# Altium PCB 光耦驱动.PcbDoc
Units mil, origin at the board's own origin, x right, y up, seen from the top; angles counter-clockwise.
Board outline 5000 x 4000 mil, 2 copper layers (Top Layer, Bottom Layer); 45 components, 35 nets, 203 pads, 0 vias.
Unrouted connection lines stored in the file: 9.
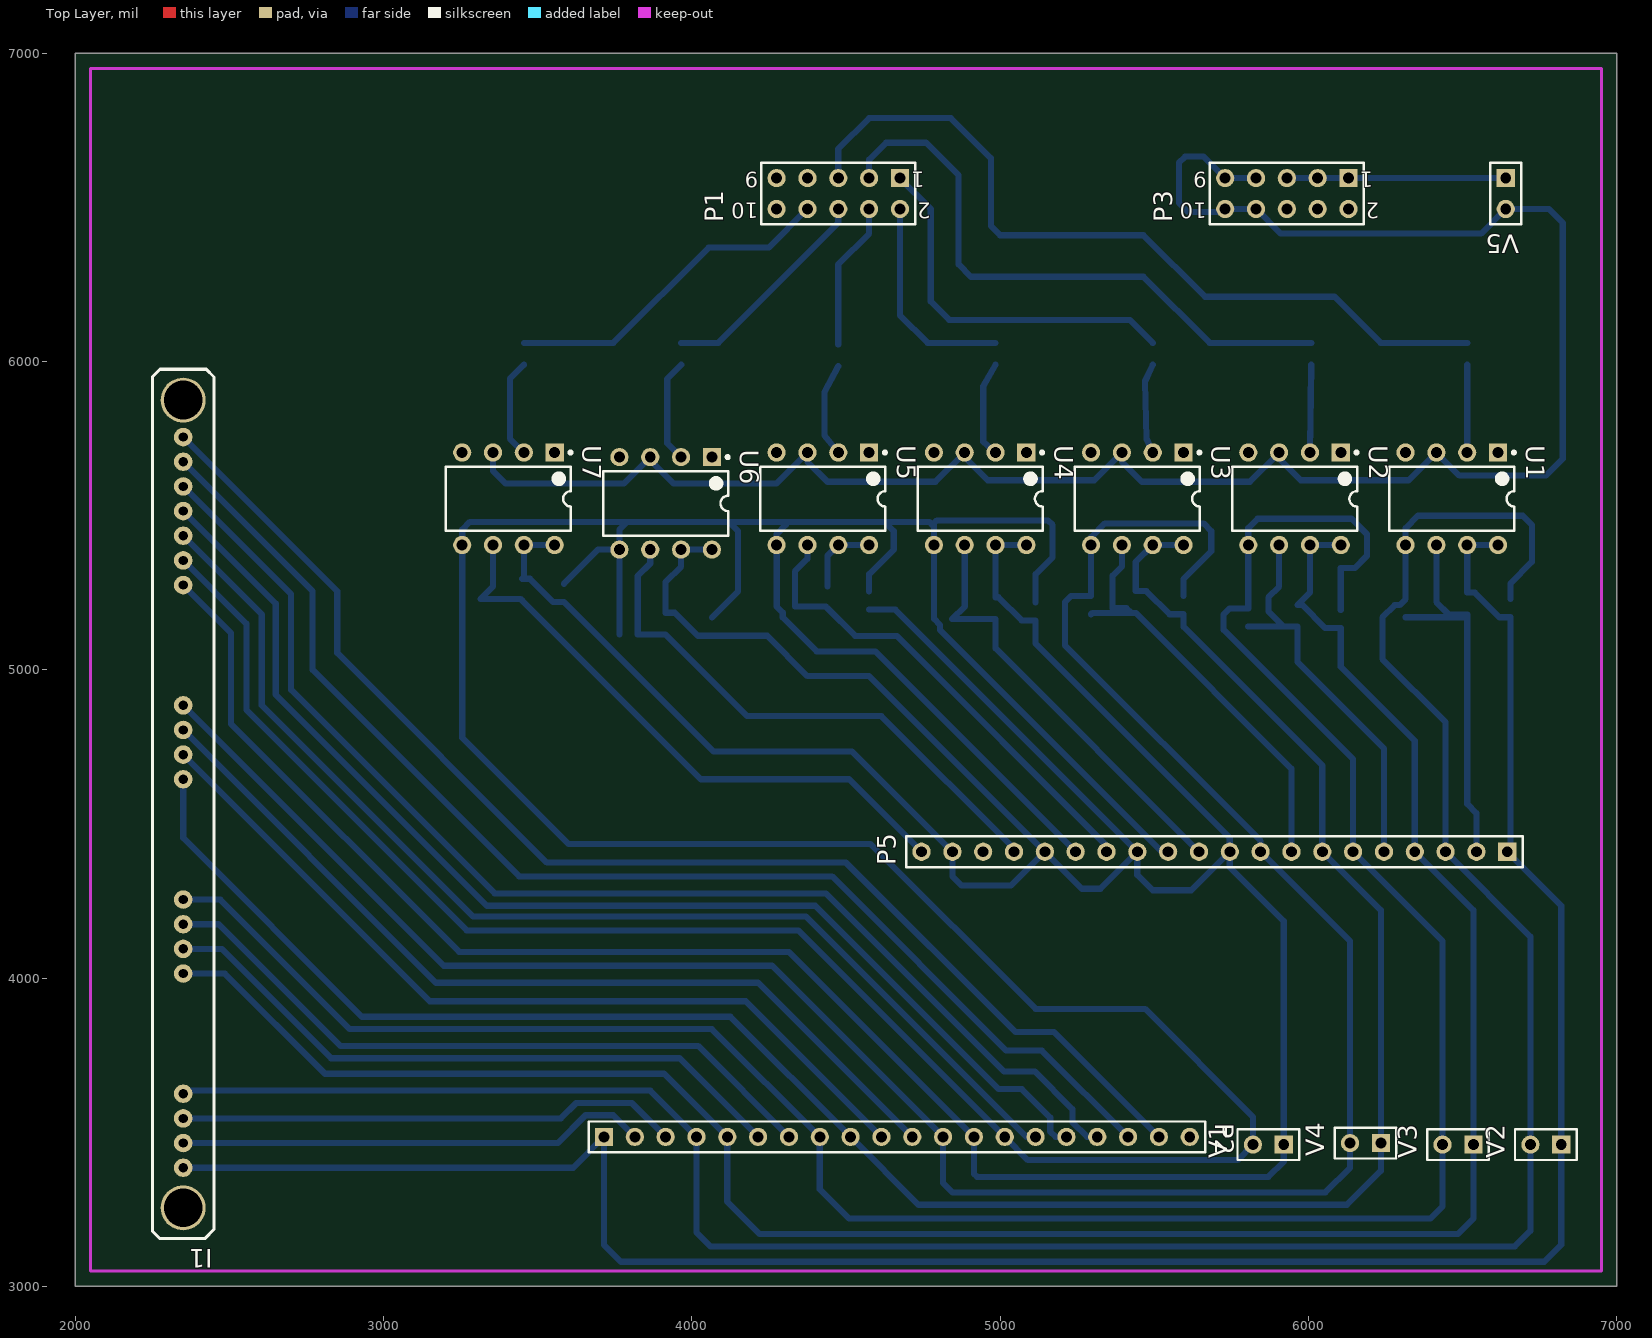
[diagram p0: Top Layer view]
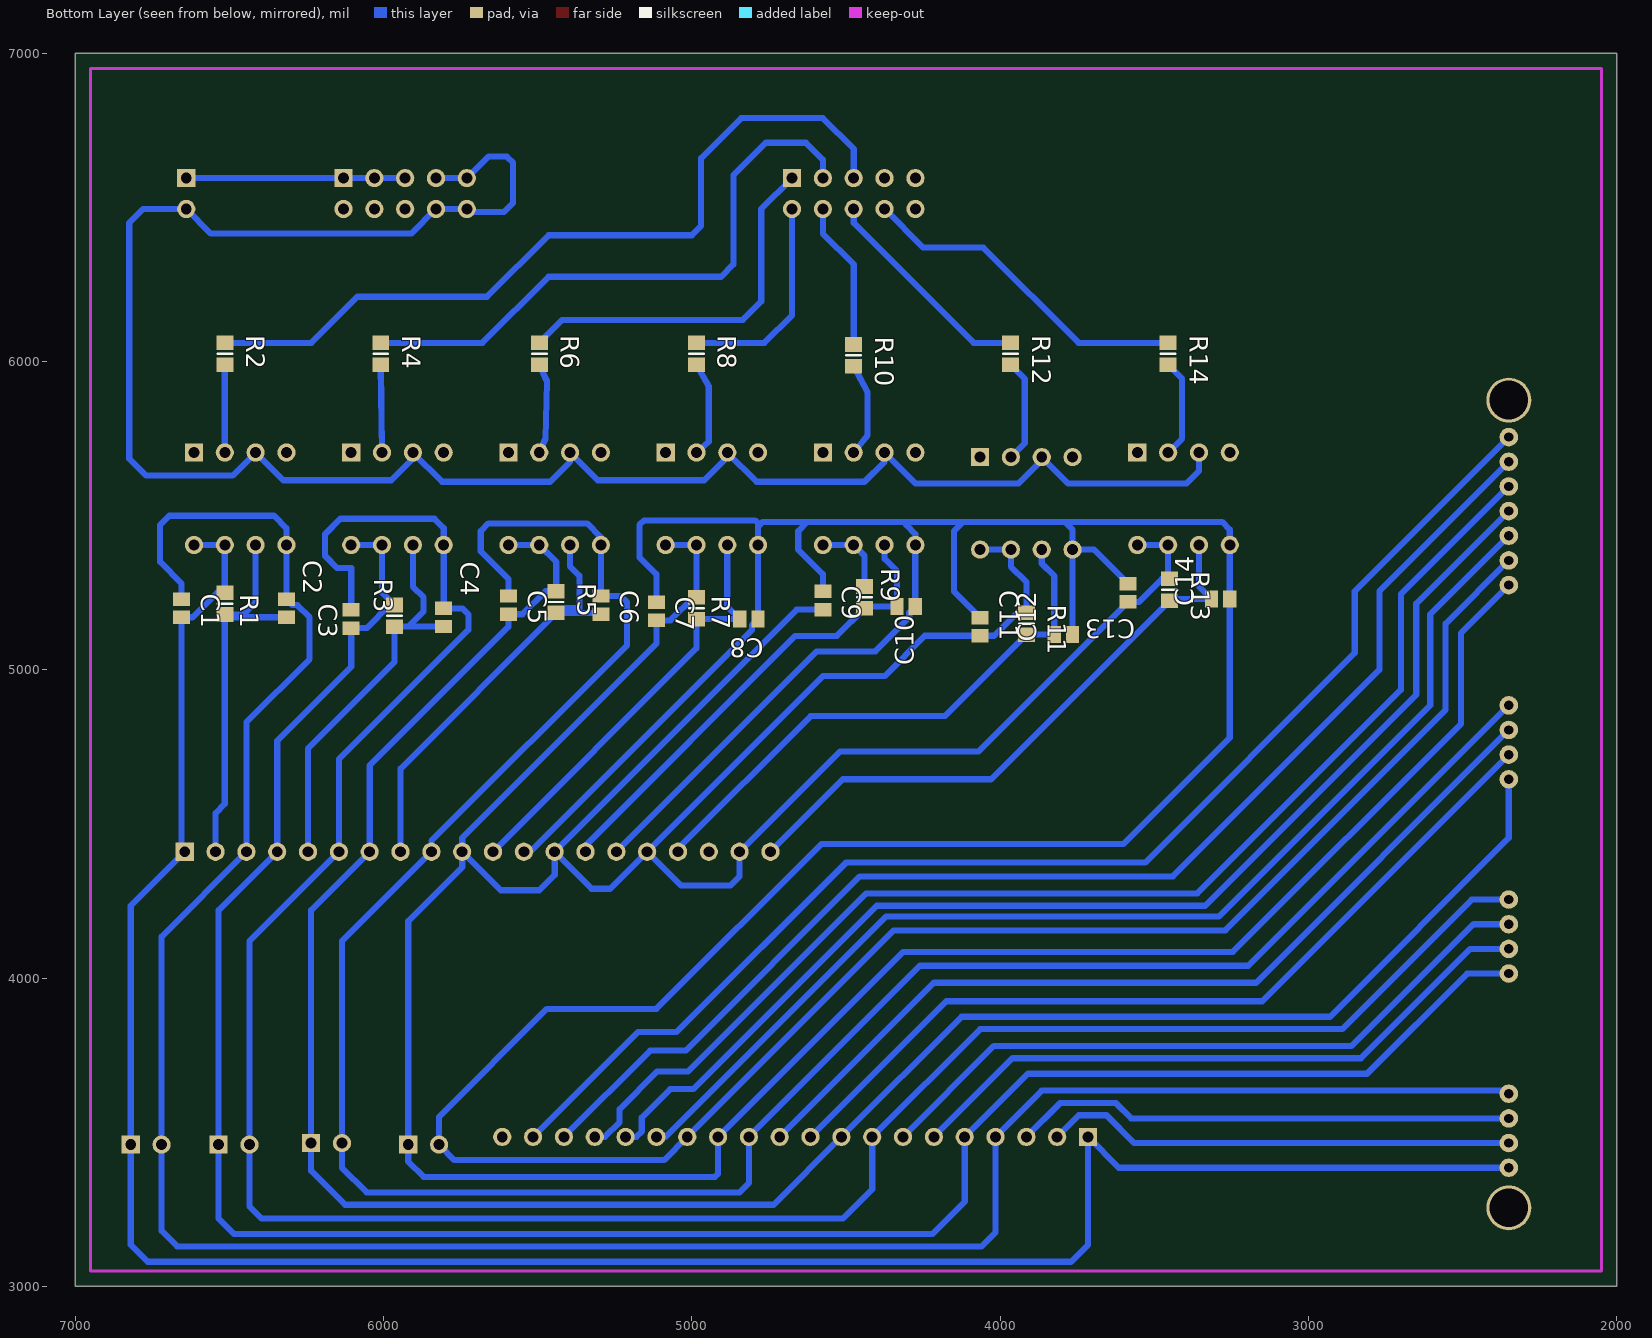
[diagram p1: Bottom Layer view, seen from below]

## Layer stack, top to bottom
Top Layer: signal copper 1.4
Dielectric: dielectric 12.6, FR-4, Dk 4.8
Bottom Layer: signal copper 1.4

## Board outline
2000,3000 7000,3000 7000,7000 2000,7000

## Design rules (kind name [scope] priority, off if disabled: settings)
Clearance [All] p1: gap=8
PolygonConnect [All] p1: connectstyle=Relief reliefconductorwidth=10 reliefentries=4 polygonreliefangle="90 Angle" airgapwidth=10
RoutingVias [All] p1: holewidth=25 width=40 viastyle="Through Hole" minholewidth=28 minwidth=50 maxholewidth=28 maxwidth=50
SolderMaskExpansion [All] p1: expansion=4
Width [All] p1: maxlimit=30 minlimit=20 preferedwidth=20
28 further rules are at their usual default settings.

## Components (designator, comment, footprint, x,y, rotation, side; value= is the part's Value field where it differs from the comment)
C1 "Cap" C0805 6655,5200 r270 bottom
C2 "Cap" C0805 6315,5200 r270 bottom
C3 "Cap" C0805 6105,5165 r270 bottom
C4 "Cap" C0805 5805,5170 r270 bottom
C5 "Cap" C0805 5595,5210 r270 bottom
C6 "Cap" C0805 5295,5210 r270 bottom
C7 "Cap" C0805 5115,5190 r270 bottom
C8 "Cap" C0805 4815,5165 r0 bottom
C9 "Cap" C0805 4575,5225 r270 bottom
C10 "Cap" C0805 4305,5205 r0 bottom
C11 "Cap" C0805 4065,5140 r270 bottom
C12 "Cap" C0805 3795,5115 r0 bottom
C13 "Cap" C0805 3585,5250 r270 bottom
C14 "Cap" C0805 3285,5230 r0 bottom
I1 "ipm" ipm 2350,3385 r180 top
P1 "Header 5X2" HDR2X5 4675,6595 r180 top
P2 "Header 20" HDR1X20 3715,3485 r0 top
P3 "Header 5X2" HDR2X5 6130,6595 r180 top
P5 "Header 20" HDR1X20 6645,4410 r180 top
R1 "Res2" 6-0805_N 6515,5215 r270 bottom
R2 "Res2" 6-0805_N 6515,6025 r270 bottom
R3 "Res2" 6-0805_N 5965,5175 r270 bottom
R4 "Res2" 6-0805_N 6009.17,6025 r270 bottom
R5 "Res2" 6-0805_N 5440,5220 r270 bottom
R6 "Res2" 6-0805_N 5495,6025 r270 bottom
R7 "Res2" 6-0805_N 4985,5200 r270 bottom
R8 "Res2" 6-0805_N 4985,6025 r270 bottom
R9 "Res2" 6-0805_N 4440,5235 r270 bottom
R10 "Res2" 6-0805_N 4475,6020 r270 bottom
R11 "Res2" 6-0805_N 3915,5150 r270 bottom
R12 "Res2" 6-0805_N 3965.83,6025 r270 bottom
R13 "Res2" 6-0805_N 3450,5260 r270 bottom
R14 "Res2" 6-0805_N 3455,6025 r270 bottom
U1 "4504" DIP-8 6465,5555 r270 top
U2 "4504" DIP-8 5955,5555 r270 top
U3 "4504" DIP-8 5445,5555 r270 top
U4 "4504" DIP-8 4935,5555 r270 top
U5 "4504" DIP-8 4425,5555 r270 top
U6 "4504" DIP-8 3915,5540 r270 top
U7 "4504" DIP-8 3405,5555 r270 top
V1 "Header 2" HDR1X2 5920,3460 r180 top
V2 "Header 2" HDR1X2 6820,3460 r180 top
V3 "Header 2" HDR1X2 6535,3460 r180 top
V4 "Header 2" HDR1X2 6235,3465 r180 top
V5 "Header 2" HDR1X2 6640,6595 r270 top

## Footprints (in the part's own frame and the unit in brackets; to place one, negate y for a bottom-side part, rotate by r counter-clockwise, add the part's x,y. Pads: shape width x height; smd on the part's side, far side on the other; paste and mask are expansions set on the pad)
6-0805_N [mm] "Chip Resistor, Body 2.0x1.2mm, IPC Medium Density"
  rect 1.2x1.4 smd: 1(-0.9,0) 2(0.9,0)
  silkscreen extent 0,-0.6 0,0.6, body extent -1.07,-0.7 1.07,0.7, height 0.7
C0805 [mm] "Chip Capacitor, Body 2.0x1.3mm, IPC High Density"
  rect 1.1x1.4 smd: 1(-0.75,0) 2(0.75,0)
  body extent -1.1,-0.72 1.1,0.72, height 1.4
DIP-8 [mm] "DIP; 8 Leads; Row Spacing 7.62 mm; Pitch 2.54 mm"
  rect 1.5x1.5 hole 0.9: 1(-3.81,3.81)
  round 1.5 hole 0.9: 2(-3.81,1.27) 3(-3.81,-1.27) 4(-3.81,-3.81) 5(3.81,-3.81) 6(3.81,-1.27) 7(3.81,1.27) 8(3.81,3.81)
  silkscreen extent -3.93,-5.15 2.65,5.24, body extent -3.6,-5.15 3.6,5.15, height 5.08
HDR1X2 [mm] "Connector; Header; 2 Position"
  rect 1.5x1.5 hole 0.9: 1(0,0)
  round 1.5 hole 0.9: 2(2.54,0)
  silkscreen extent -1.27,-1.27 3.81,1.27
HDR1X20 [mm] "Connector; Header; 20 Position"
  rect 1.5x1.5 hole 0.9: 1(0,0)
  round 1.5 hole 0.9: 2(2.54,0) 3(5.08,0) 4(7.62,0) 5(10.16,0) 6(12.7,0) 7(15.24,0) 8(17.78,0) 9(20.32,0) 10(22.86,0) 11(25.4,0) 12(27.94,0) 13(30.48,0) 14(33.02,0) 15(35.56,0) 16(38.1,0) 17(40.64,0) 18(43.18,0) 19(45.72,0) 20(48.26,0)
  silkscreen extent -1.27,-1.27 49.53,1.27
HDR2X5 [mm] "Connector; Header; 5x2 Position"
  rect 1.5x1.5 hole 0.9: 1(0,0)
  round 1.5 hole 0.9: 2(0,2.54) 3(2.54,0) 4(2.54,2.54) 5(5.08,0) 6(5.08,2.54) 7(7.62,0) 8(7.62,2.54) 9(10.16,0) 10(10.16,2.54)
  silkscreen extent -1.27,-1.27 11.43,3.81
ipm [mil]
  round 60 hole 30: 1(0,0) 2(0,-80) 3(0,-160) 4(0,-240) 5(0,-630) 6(0,-710) 7(0,-790) 8(0,-870) 9(0,-1260) 10(0,-1340) 11(0,-1420) 12(0,-1500) 13(0,-1890) 14(0,-1970) 15(0,-2050) 16(0,-2130) 17(0,-2210) 18(0,-2290) 19(0,-2370)
  round 145.67 hole 125.98: 20(0,130) 21(0,-2490)
  silkscreen extent -100,-2590 100,230

## Part data
C1 C2 C3 C4 C5 C6 C7 C8 C9 C10 C11 C12 C13 C14: "Capacitor"
P1 P3: "Header, 5-Pin, Dual row"
P2 P5: "Header, 20-Pin"
R1 R2 R3 R4 R5 R6 R7 R8 R9 R10 R11 R12 R13 R14: "Resistor"
V1 V2 V3 V4 V5: "Header, 2-Pin"

## Nets (pads, with @x,y where several pads share a name; then routed paths per layer and width w, separated by ;. In a path a pad name is that pad's centre, name@x,y a point inside that pad or via, vN(x,y) a via of type N, cw(c..) or ccw(c..) an arc to the next point about the centre after c; other vN are vias at no path point)
5V: P3.1 P3.3 P3.5 V5.1 | length 710
  Bottom Layer w20: P3.5 P3.3 P3.1 V5.1
BREAK: P1.8 R14.1 | length 1100
  Bottom Layer w20: R14.1 3745.43,6060.43 4055,6370 4250,6370 P1.8
GND: P3.7 P3.8 P3.9 P3.10 U1.3 U2.3 U3.3 U4.3 U5.3 U6.3 U7.3 V5.2 | length 6609
  Bottom Layer w20: U7.3 3355,5645 3395,5605 3780,5605 U6.3 3865,5680 3940,5605 4275,5605 U5.3 4375,5675 4440,5610 4790,5610 U4.3 4885,5690 4960,5615 5305,5615 U3.3 5395,5675 5460,5610 5810,5610 U2.3 5905,5685 5975,5615 6325,5615 U1.3 6490,5630 6770,5630 6825,5685 6825,6450 6780,6495 V5.2 6560,6415 5910,6415 P3.8 P3.10 5720,6485 5610,6485 5580,6515 5580,6645 5600,6665 5660,6665 P3.9 P3.7
IPM_BREAK: C14.2 I1.15 P2.15 P5.20 R13.2 U7.6 | length 5707.4
  Bottom Layer w20: I1.15 2605,5180 2605,4885 3290,4200 4370,4200 5085,3485 P2.15 ; U7.6 3355,5270.47 C14.2 3444.57,5230 R13.2 4029.57,4645 4510,4645 P5.20
IPM_FO: I1.19 P2.19 | length 4222.4
  Bottom Layer w20: I1.19 2850,5255 2850,5055 3530,4375 4500,4375 5050,3825 5175,3825 P2.19
IPM_NGND: C7.1 C8.1 C9.1 C10.1 C11.1 C12.1 C13.1 C14.1 I1.14 P2.14 P5.12 P5.15 P5.18 U4.5 U5.5 U6.5 U7.5 V1.2 | length 14722.7
  Bottom Layer w20: I1.14 2555,5150 2555,4870 3270,4155 4345,4155 P2.14 5090,3410 5770,3410 V1.2 5820,3550 5470,3900 5115,3900 4580,4435 3600,4435 3255.47,4779.53 C14.1 3255,5230.47 U7.5 3255,5455 3280,5480 3790,5480 ; C13.1 3695.47,5390 U6.5 ; C12.1 3765,5115.47 U6.5 ; C11.1 4150,5254.53 4150,5450 4120,5480 ; 4305,5470 4275,5440 U5.5 4275.47,5404.53 C10.1 4294.87,5185.6 4294.87,5169.98 4404.86,5060 4595,5060 P5.15 ; C9.1 4575,5310 4655,5390 4655,5450 4625,5480 ; C7.1 5115,5310 5170,5365 5170,5470 5155,5485 4810,5485 4795,5485 4785,5475 ; P5.12 5524.86,4410 4804.87,5129.98 4804.87,5145.6 C8.1 4785,5165.47 U4.5 4785,5475 ; U6.5 3765,5455 3790,5480 ; 3790,5480 4120,5480 ; 4120,5480 4625,5480 ; 4625,5480 4770,5480 4780,5470 4785,5475
IPM_NVCC: C7.2 C9.2 C11.2 C13.2 I1.13 P2.13 P5.10 P5.13 P5.16 P5.19 R7.1 R9.1 R11.1 R13.1 U4.7 U4.8 U5.7 U5.8 U6.7 U6.8 U7.7 U7.8 V1.1 | length 13738.4
  Bottom Layer w20: I1.13 2505,5120 2505,4825 3245,4085 4315,4085 P2.13 4915,3365 4925,3355 5870,3355 5920,3405 V1.1 5920,4185 5745,4360 P5.10 ; U7.8 U7.7 3455,5300.43 R13.1 3474.57,5295.43 3549.53,5220.47 C13.2 4070.47,4735 4520,4735 P5.19 4845,4330 4875,4300 5035,4300 P5.16 ; U6.8 U6.7 3965,5335 3915,5285 R11.1 3944.57,5185.43 4019.53,5110.47 C11.2 4244.53,5110.47 4375,4980 4575,4980 P5.16 ; R9.1 4440,5370 U5.7 U5.8 ; C9.2 4659.53,5195.47 P5.13 ; U4.8 U4.7 R7.1 4994.57,5235.43 5069.53,5160.47 C7.2 5115,5085 5745,4455 P5.10 ; 5487.5,4292.5 5495,4285 ; P5.16 5265,4290 5325,4290 P5.13 ; P5.13 5445,4335 5495,4285 ; 5495,4285 5620,4285 P5.10
IPM_UFO: I1.2 P2.2 | length 1531.3
  Bottom Layer w20: I1.2 3565,3465 3655,3555 3745,3555 P2.2
IPM_UGND: C1.1 C2.1 I1.4 P2.4 P5.3 U1.5 V2.2 | length 8013.2
  Bottom Layer w20: I1.4 2360,3635 3865,3635 P2.4 4015,3175 4060,3130 6670,3130 6720,3180 V2.2 6720,4135 P5.3 6445,4830 6239.86,5035.14 6239.86,5170 6279.98,5210.13 6295.6,5210.13 C2.1 U1.5 6315,5460 6355,5500 6695,5500 6725,5470 6725,5350 6655,5280 C1.1
IPM_UN: C12.2 I1.16 P2.16 P5.17 R11.2 U6.6 | length 5715.1
  Bottom Layer w20: I1.16 2650,5215 2650,4920 3335,4235 4400,4235 4995,3640 5070,3640 5162.53,3547.47 5162.53,3502.47 5180,3485 P2.16 ; U6.6 3865,5345 3824.53,5304.53 C12.2 3824.96,5114.57 R11.2 4179.57,4850 4615,4850 5045,4420 P5.17
IPM_UP: C2.2 I1.3 P2.3 P5.2 R1.2 U1.6 | length 2918.8
  Bottom Layer w20: I1.3 3575,3545 3625,3595 3805,3595 P2.3 ; C2.2 6505.91,5170.47 R1.2 ; U1.6 6415,5220 6455.43,5179.57 R1.2 ; P5.2 6545,4535 6515,4565 R1.2
IPM_UVCC: C1.2 I1.1 P2.1 P5.1 R1.1 U1.7 U1.8 V2.1 | length 7455.9
  Bottom Layer w20: I1.1 3615,3385 P2.1 3715,3135 3770,3080 3785,3080 ; 3790,3080 6765,3080 6820,3135 V2.1 6820,4235 P5.1 6655,4420 C1.2 6619.53,5170.47 6539.57,5250.43 R1.1 U1.7 U1.8 U1.8@6625,5395
IPM_VFO: I1.6 P2.6 | length 2117.7
  Bottom Layer w20: I1.6 2475,4095 2830,3740 3960,3740 P2.6
IPM_VGND: C3.1 C4.1 I1.8 P2.8 P5.6 U2.5 V3.2 | length 7917.7
  Bottom Layer w20: I1.8 2470,4255 2890,3835 4065,3835 P2.8 4415,3315 4510,3220 6395,3220 6435,3260 V3.2 6435,4120 P5.6 6145,4710 5725,5130 5725,5180 5744.53,5199.53 C4.1 U2.5 5805,5460 5835,5490 6140,5490 6190,5440 6190,5370 6150,5330 6105,5330 C3.1
IPM_VN: C10.2 I1.17 P2.17 P5.14 R9.2 U5.6 | length 5613.9
  Bottom Layer w20: I1.17 2700,5245 2700,4935 3360,4275 4435,4275 5012.5,3697.5 5112.5,3697.5 5234.69,3575.31 5234.69,3532.53 5282.21,3485 P2.17 ; U5.6 4375,5360 4334.53,5319.53 C10.2 4434.57,5205 R9.2 4529.57,5110 4665,5110 5345,4430 P5.14
IPM_VP: C4.2 I1.7 P2.7 P5.5 R3.2 U2.6 | length 3556.3
  Bottom Layer w20: I1.7 2465,4175 2860,3780 4020,3780 P2.7 ; C4.2 5919.53,5140.47 ; U2.6 5905,5270 5870,5235 5870,5190 5919.53,5140.47 ; P5.5 6245,4745 5965,5025 R3.2 5964.09,5140.47 5919.53,5140.47
IPM_VVCC: C3.2 I1.5 P2.5 P5.4 R3.1 U2.7 U2.8 V3.1 | length 7254.5
  Bottom Layer w20: I1.5 2485,4015 2810,3690 3910,3690 P2.5 4115,3275 4220,3170 6485,3170 6535,3220 V3.1 6535,4220 P5.4 6345,4770 6105,5010 C3.2 6054.53,5135.47 5979.57,5210.43 R3.1 6005,5250.43 U2.7 U2.8
IPM_WFO: I1.10 P2.10 | length 2778.6
  Bottom Layer w20: I1.10 3150,3925 4175,3925 P2.10
IPM_WGND: C5.1 C6.1 I1.12 P2.12 P5.9 U3.5 V4.2 | length 7728.9
  Bottom Layer w20: I1.12 3195,4040 4260,4040 P2.12 4815,3335 4845,3305 6055,3305 6135,3385 V4.2 6135,4120 P5.9 5845,4445 5210,5080 5210,5220 5229.53,5239.53 C6.1 U3.5 5295,5430 5340,5475 5660,5475 5685,5450 5685,5385 5595,5295 C5.1
IPM_WN: C8.2 I1.18 P2.18 P5.11 R7.2 U4.6 | length 5546.9
  Bottom Layer w20: I1.18 2770,5255 2770,5000 3440,4330 4455,4330 5020,3765 5135,3765 P2.18 ; U4.6 4885,5205.47 C8.2 4844.96,5164.57 R7.2 4985,5070 P5.11
IPM_WP: C6.2 I1.11 P2.11 P5.8 R5.2 U3.6 | length 4326
  Bottom Layer w20: I1.11 3170,3985 4215,3985 P2.11 ; C6.2 5299.09,5184.57 R5.2@5425,5184.57 ; U3.6 5395,5335 5365,5305 5365,5200 5409.57,5200 R5.2@5425,5184.57 ; P5.8 5945,4679.57 R5.2 R5.2@5425,5184.57
IPM_WVCC: C5.2 I1.9 P2.9 P5.7 R5.1 U3.7 U3.8 V4.1 | length 7142.4
  Bottom Layer w20: I1.9 2350,4455 2930,3875 4125,3875 P2.9 4735,3265 6125,3265 6235,3375 V4.1 6235,4220 P5.7 6045,4690 5595,5140 C5.2 5549.53,5180.47 5474.57,5255.43 R5.1 5440,5350 U3.7 U3.8
NetR2_2: R2.2 U1.2 | length 284.6
  Bottom Layer w20: U1.2 R2.2
NetR4_2: R4.2 U2.2 | length 284.6
  Bottom Layer w20: U2.2 R4.2
NetR6_2: R6.2 U3.2 | length 294.3
  Bottom Layer w20: U3.2 5475,5750 5470,5935 R6.2
NetR8_2: R8.2 U4.2 | length 313.4
  Bottom Layer w20: U4.2 4945,5740 4945,5920 R8.2
NetR10_2: R10.2 U5.2 | length 306.9
  Bottom Layer w20: U5.2 4430,5760 4430,5900 R10.2
NetR12_2: R12.2 U6.2 | length 338.4
  Bottom Layer w20: U6.2@3965.83,5690.83 U6.2 3920,5735 3920,5943.73 R12.2
NetR14_2: R14.2 U7.2 | length 321.8
  Bottom Layer w20: U7.2 3410,5750 3410,5944.57 R14.2
PWM_UN: P1.6 R12.1 | length 715.5
  Bottom Layer w20: R12.1 4085.43,6060.43 4475,6450 P1.6
PWM_UP: P1.5 R2.1 | length 2607.5
  Bottom Layer w20: P1.5 4475,6690 4575,6790 4840,6790 4970,6660 4970,6440 5000,6410 5465,6410 5665,6210 6085,6210 6234.57,6060.43 R2.1
PWM_VN: P1.4 R10.1 | length 481
  Bottom Layer w20: R10.1 4475,6315 4575,6415 P1.4
PWM_VP: P1.3 R4.1 | length 1955.9
  Bottom Layer w20: P1.3 4575,6655 4630,6710 4760,6710 4865,6605 4865,6315 4905,6275 5465,6275 5679.57,6060.43 R4.1
PWM_WN: P1.2 R8.1 | length 692.1
  Bottom Layer w20: P1.2 4675,6150 4764.57,6060.43 R8.1
PWM_WP: P1.1 R6.1 | length 1217.2
  Bottom Layer w20: P1.1 4775,6495 4775,6195 4835,6135 5420.43,6135 R6.1
pads on no net: I1.20 I1.21 P1.7 P1.9 P1.10 P2.20 P3.2 P3.4 P3.6 U1.1 U1.4 U2.1 U2.4 U3.1 U3.4 U4.1 U4.4 U5.1 U5.4 U6.1 U6.4 U7.1 U7.4

## Keep-outs
Keep-Out Layer:
  lines w10: 2050,3050 2050,6950 6950,6950 6950,3050 2050,3050

## Dimensions
2050,3050 to 2050,6950 on Mechanical 1
2050,3050 to 6950,3050 on Mechanical 1

## Text inside footprints (layer, text, board x,y; h text height)
P1: Top Overlay "10" at 4215,6515 h50 r180; Top Overlay "9" at 4215,6615 h50 r180; Top Overlay "1" at 4755,6615 h50 r180; Top Overlay "2" at 4775,6515 h50 r180
P3: Top Overlay "10" at 5670,6515 h50 r180; Top Overlay "9" at 5670,6615 h50 r180; Top Overlay "1" at 6210,6615 h50 r180; Top Overlay "2" at 6230,6515 h50 r180